# EAGLE board LM3S811 Module (EAGLE 6.3)
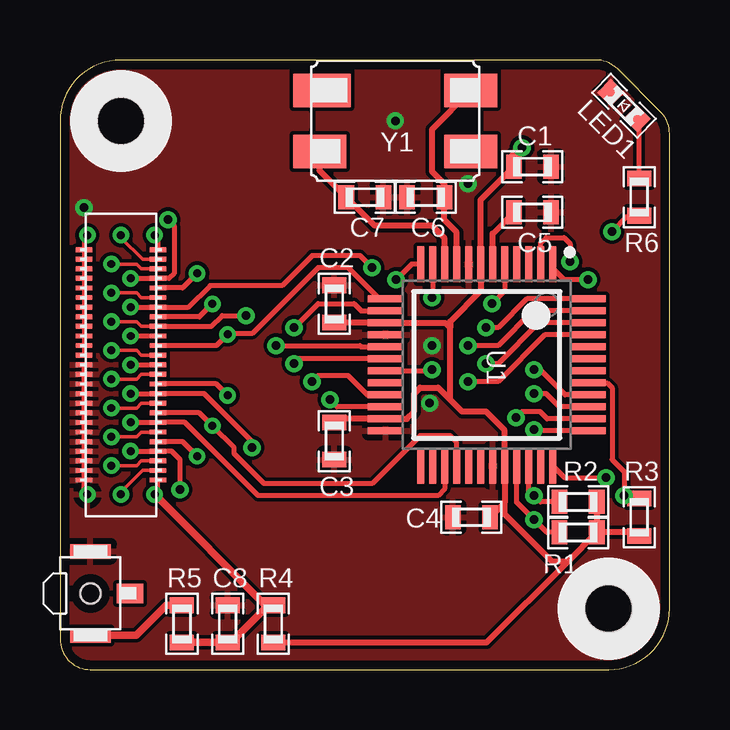
[diagram p0: board, top side]
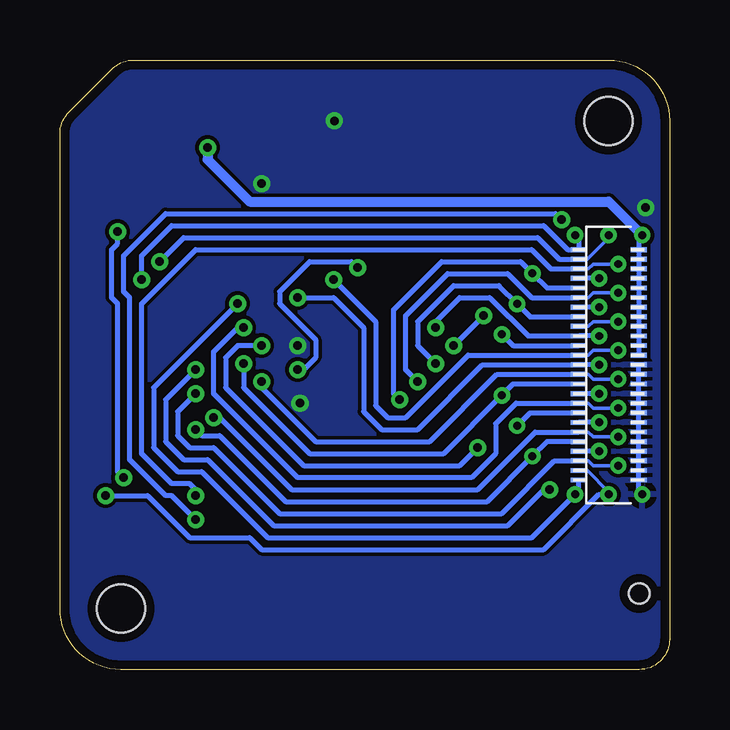
[diagram p1: board, bottom side, seen from below]

Size 25.4 x 25.4 mm. Coordinates in mm from the lower left corner, seen from the top.
Outline: 0,22.86 0,1.27 arc90 1.27,0 22.86,0 arc90 25.4,2.54 25.4,22.33 arc45 25.03,23.23 23.23,25.03 arc45 22.33,25.4 2.54,25.4 arc90 0,22.86
Copper layers (1*16): Top 0.0356mm / dielectric 1.5011mm / Bottom 0.0356mm
Design rules "default": minimum track width 6mil, minimum drill 13mil, track to track 6mil, track to pad 6mil, pad to pad 6mil, via to via 6mil, smd to smd 6mil, copper to edge 15mil, drill to drill 6mil, minimum pad ring 7mil, minimum via ring 7mil, stop-mask expansion 4mil, vias tented up to drill 16mil, thermal gap 10mil
tRestrict: 2 lines

## Footprints (pad centres in the part's own frame; a part is rotated, then mirrored left to right if it is on the bottom)
0603 = smd 0.65 x 1: 1 -0.775,0; 2 0.775,0
0603.LED = smd 0.8 x 0.8: P$1 -0.775,0; P$2 0.775,0
QFP50P900X900X160-48N = smd 1.5 x 0.3: 1 -4.2,2.75; 2 -4.2,2.25; 3 -4.2,1.75; 4 -4.2,1.25; 5 -4.2,0.75; 6 -4.2,0.25; 7 -4.2,-0.25; 8 -4.2,-0.75; 9 -4.2,-1.25; 10 -4.2,-1.75; 11 -4.2,-2.25; 12 -4.2,-2.75; 25 4.2,-2.75; 26 4.2,-2.25; 27 4.2,-1.75; 28 4.2,-1.25; 29 4.2,-0.75; 30 4.2,-0.25; 31 4.2,0.25; 32 4.2,0.75; 33 4.2,1.25; 34 4.2,1.75; 35 4.2,2.25; 36 4.2,2.75 | smd 0.3 x 1.5: 13 -2.75,-4.2; 14 -2.25,-4.2; 15 -1.75,-4.2; 16 -1.25,-4.2; 17 -0.75,-4.2; 18 -0.25,-4.2; 19 0.25,-4.2; 20 0.75,-4.2; 21 1.25,-4.2; 22 1.75,-4.2; 23 2.25,-4.2; 24 2.75,-4.2; 37 2.75,4.2; 38 2.25,4.2; 39 1.75,4.2; 40 1.25,4.2; 41 0.75,4.2; 42 0.25,4.2; 43 -0.25,4.2; 44 -0.75,4.2; 45 -1.25,4.2; 46 -1.75,4.2; 47 -2.25,4.2; 48 -2.75,4.2
2MM = hole 2: 0,0
ROOT1.BOTH = smd 0.66 x 0.2 bottom: 01 3.795,13.9; 02 3.795,13.5; 03 3.795,13.1; 3.3V@1 1.285,17.5; 3.3V@2 1.285,17.1; 3.3V@3 1.285,16.7; 3.3V@4 1.285,16.3; 3.3V@5 1.285,15.9; 3.3V@6 1.285,15.5; 3.3V@7 1.285,15.1; 3.3V@8 1.285,14.7; 3.3V@9 1.285,14.3; 3.3V@10 1.285,13.9; 3.3V@11 1.285,13.5; 3.3V@12 1.285,13.1; 04 3.795,12.7; 05 3.795,12.3; 06 3.795,11.9; 07 3.795,11.5; ADC0 3.795,17.5; ADC1 3.795,17.1; GND@1 1.285,7.9; GND@2 1.285,8.3; GND@3 1.285,8.7; GND@4 1.285,9.1; GND@5 1.285,9.5; GND@6 1.285,9.9; GND@7 1.285,10.3; GND@8 1.285,10.7; GND@9 1.285,11.1; GND@10 1.285,11.5; GND@11 1.285,11.9; GND@12 1.285,12.3; GND@13 1.285,12.7; MISO 3.795,15.5; MOSI 3.795,15.9; RST 3.795,7.9; RXI 3.795,14.3; RXI.DBG 3.795,10.3; SCL 3.795,16.3; SCLK 3.795,15.1; SDA 3.795,16.7; TCK 3.795,9.1; TDI 3.795,9.9; TDO 3.795,9.5; TMS 3.795,8.7; TRST 3.795,8.3; TXO 3.795,14.7; TXO.DBG 3.795,10.7; WAKE 3.795,11.1 | smd 0.7 x 0.2: 01@1 4.08,13.9; 02@1 4.08,13.5; 3.3V@13 1,17.5; 3.3V@14 1,17.1; 3.3V@15 1,16.7; 3.3V@16 1,16.3; 3.3V@17 1,15.9; 3.3V@18 1,15.5; 3.3V@19 1,15.1; 3.3V@20 1,14.7; 3.3V@21 1,14.3; 3.3V@22 1,13.9; 3.3V@23 1,13.5; 3.3V@24 1,13.1; 03@1 4.08,13.1; 04@1 4.08,12.7; 05@1 4.08,12.3; 06@1 4.08,11.9; 07@1 4.08,11.5; ADC0@1 4.08,17.5; ADC1@1 4.08,17.1; GND@14 1,7.9; GND@15 1,8.3; GND@16 1,8.7; GND@17 1,9.1; GND@18 1,9.5; GND@19 1,9.9; GND@20 1,10.3; GND@21 1,10.7; GND@22 1,11.1; GND@23 1,11.5; GND@24 1,11.9; GND@25 1,12.3; GND@26 1,12.7; MISO@1 4.08,15.5; MOSI@1 4.08,15.9; RST@1 4.08,7.9; RXI.DBG@1 4.08,10.3; RXI@1 4.08,14.3; SCL@1 4.08,16.3; SCLK@1 4.08,15.1; SDA@1 4.08,16.7; TCK@1 4.08,9.1; TDI@1 4.08,9.9; TDO@1 4.08,9.5; TMS@1 4.08,8.7; TRST@1 4.08,8.3; TXO.DBG@1 4.08,10.7; TXO@1 4.08,14.7; WAKE@1 4.08,11.1 | drill 0.33 pad 0.686: 01@VIA 2.94,13.9; 02@VIA 6.985,13.97; 3.3V@VIA 1.14,18.1; 03@VIA 2.14,13.3; 04@VIA 2.94,12.7; 05@VIA 2.14,12.1; 06@VIA 6.985,11.43; 07@VIA 2.94,11.5; ADC0@VIA 3.94,18.1; ADC1@VIA 2.54,18.1; GND@VIA 1.14,7.3; MISO@VIA 2.14,15.7; MOSI@VIA 5.715,16.51; RST@VIA 3.94,7.3; RXI.DBG@VIA 2.94,10.3; RXI@VIA 2.14,14.5; SCL@VIA 2.94,16.3; SCLK@VIA 2.94,15.1; SDA@VIA 2.14,16.9; TCK@VIA 2.94,9.1; TDI@VIA 2.14,9.7; TDO@VIA 5.715,8.89; TMS@VIA 2.14,8.5; TRST@VIA 2.54,7.3; TXO.DBG@VIA 6.35,10.16; TXO@VIA 6.35,15.24; WAKE@VIA 2.14,10.9
B3U-3100P(M)-B = smd 0.6 x 1.7: 1 -1.75,0; 2 1.75,0 | smd 0.8 x 1.1: GND 0,-1.65 | hole 0.85: 0,0
7X5MM = smd 2.2 x 1.4: 1 -3.15,-1.27; 2 -3.15,1.27; 3 3.15,1.27 | smd 2.4 x 1.4: 4 3.05,-1.27

## Placement (x,y rotation side)
C1  .1uF  [0603]  19.68,20.95 0 top
C2  .1uF  [0603]  11.43,15.24 90 top
C3  .1uF  [0603]  11.43,9.53 270 top
C4  .1uF  [0603]  17.14,6.35 180 top
C5  1uF  [0603]  19.68,19.05 0 top
C6  18pF  [0603]  15.24,19.68 180 top
C7  18pF  [0603]  12.7,19.68 0 top
C8  .01uF  [0603]  6.99,1.91 90 top
LED1  [0603.LED]  23.5,23.5 135 top
R1  2.2k  [0603]  21.59,5.71 180 top
R2  2.2k  [0603]  21.59,6.99 180 top
R3  10k  [0603]  24.13,6.35 90 top
R4  10k  [0603]  8.89,1.91 90 top
R5  470  [0603]  5.08,1.91 90 top
R6  470  [0603]  24.13,19.68 270 top
U1  LM3S811  [QFP50P900X900X160-48N]  17.78,12.7 270 top
U$3  HOLE.2MM  [2MM]  22.86,2.54 90 top
U$4  HOLE.2MM  [2MM]  2.54,22.86 90 top
U$8  ROOT1.BOTH  [ROOT1.BOTH]  0,0 0 top
U$10  B3U-3100P(M)-B  [B3U-3100P(M)-B]  1.27,3.17 90 top
Y1  CRYSTAL.7X5MM  [7X5MM]  13.97,22.86 180 top

## Library data of the parts
C1-C8 LED1 R1-R6 = .standardparts
U1 = RASEagleLib
U$3 U$4 = .screw_holes
U$8 = thinkmaketest
U$10 = omron
Y1 = abracon

## Nets
01: U1.14 U$8.01 U$8.01@1 U$8.01@VIA
02: U1.13 U$8.02 U$8.02@1 U$8.02@VIA
03: U1.12 U$8.03 U$8.03@1 U$8.03@VIA
3.3V: C1.1 C2.1 C3.1 C4.1 R1.1 R2.1 R3.1 R4.1 U1.7 U1.15 U1.23 U1.32 U$8.3.3V@1 U$8.3.3V@2 U$8.3.3V@3 U$8.3.3V@4 U$8.3.3V@5 U$8.3.3V@6 U$8.3.3V@7 U$8.3.3V@8 U$8.3.3V@9 U$8.3.3V@10 U$8.3.3V@11 U$8.3.3V@12 U$8.3.3V@13 U$8.3.3V@14 U$8.3.3V@15 U$8.3.3V@16 U$8.3.3V@17 U$8.3.3V@18 U$8.3.3V@19 U$8.3.3V@20 U$8.3.3V@21 U$8.3.3V@22 U$8.3.3V@23 U$8.3.3V@24 U$8.3.3V@VIA
04: U1.11 U$8.04 U$8.04@1 U$8.04@VIA
05: U1.45 U$8.05 U$8.05@1 U$8.05@VIA
06: U1.46 U$8.06 U$8.06@1 U$8.06@VIA
07: U1.47 U$8.07 U$8.07@1 U$8.07@VIA
!RST: C8.1 R4.2 R5.1 U1.5 U$8.RST U$8.RST@1 U$8.RST@VIA
ADC0: U1.1 U$8.ADC0 U$8.ADC0@1 U$8.ADC0@VIA
ADC1: U1.2 U$8.ADC1 U$8.ADC1@1 U$8.ADC1@VIA
GND: C1.2 C2.2 C3.2 C4.2 C5.2 C6.2 C7.2 C8.2 LED1.P$2 U1.8 U1.16 U1.24 U1.31 U$8.GND@1 U$8.GND@2 U$8.GND@3 U$8.GND@4 U$8.GND@5 U$8.GND@6 U$8.GND@7 U$8.GND@8 U$8.GND@9 U$8.GND@10 U$8.GND@11 U$8.GND@12 U$8.GND@13 U$8.GND@14 U$8.GND@15 U$8.GND@16 U$8.GND@17 U$8.GND@18 U$8.GND@19 U$8.GND@20 U$8.GND@21 U$8.GND@22 U$8.GND@23 U$8.GND@24 U$8.GND@25 U$8.GND@26 U$8.GND@VIA U$10.2
MISO: U1.21 U$8.MISO U$8.MISO@1 U$8.MISO@VIA
MOSI: U1.22 U$8.MOSI U$8.MOSI@1 U$8.MOSI@VIA
N$1: R5.2 U$10.1
N$2: LED1.P$1 R6.1
N$3: C5.1 U1.6
N$4: R6.2 U1.36
N$7: C7.1 U1.10 Y1.3
N$8: C6.1 U1.9 Y1.1
RXI: U1.17 U$8.RXI U$8.RXI@1 U$8.RXI@VIA
RXI.DBG: U1.27 U$8.RXI.DBG U$8.RXI.DBG@1 U$8.RXI.DBG@VIA
SCL: R1.2 U1.33 U$8.SCL U$8.SCL@1 U$8.SCL@VIA
SCLK: U1.19 U$8.SCLK U$8.SCLK@1 U$8.SCLK@VIA
SDA: R2.2 U1.34 U$8.SDA U$8.SDA@1 U$8.SDA@VIA
TCK: U1.40 U$8.TCK U$8.TCK@1 U$8.TCK@VIA
TDI: U1.38 U$8.TDI U$8.TDI@1 U$8.TDI@VIA
TDO: U1.37 U$8.TDO U$8.TDO@1 U$8.TDO@VIA
TMS: U1.39 U$8.TMS U$8.TMS@1 U$8.TMS@VIA
TRST: R3.2 U1.41 U$8.TRST U$8.TRST@1 U$8.TRST@VIA
TXO: U1.18 U$8.TXO U$8.TXO@1 U$8.TXO@VIA
TXO.DBG: U1.28 U$8.TXO.DBG U$8.TXO.DBG@1 U$8.TXO.DBG@VIA
WAKE: U1.48 U$8.WAKE U$8.WAKE@1 U$8.WAKE@VIA

## Tracks (layer width: path | path; a pad name or v marks a point on that pad's centre or on a via)
01  (via drill 0.36)
  Top 0.203: v9.75,14.25 10.75,15.25 12.25,15.25 12.55,14.95 U1.14
  Bottom 0.203: v9.75,14.25 9.75,14.5 8.75,15.5 7.5,15.5 5.9,13.9 U$8.01
02
  Top 0.203: U$8.02@VIA 7.01,14 8,14 10.75,16.75 12,16.75 13.3,15.45 U1.13
03  (via drill 0.36)
  Top 0.203: U1.12 14.65,16.9 v14,16.25
  Bottom 0.203: v14,16.25 12.25,14.5 12.25,11 11.75,10.5 11,10.5 8.4,13.1 U$8.03
3.3V  (via drill 0.36)
  Top 0.254: C3.1 11.58,10.45 U1.23 14.45,10.45 14.75,10.75 14.75,11.5 15,11.75 15.75,11.75 16.25,11.25 | C2.1 11.45,14.45 U1.15 16.05,14.45 16.25,14.25 | C1.1 17.53,19.57 U1.7 17.53,15.78 16.25,14.5 16.25,14.25 | R2.1 R1.1 | 21.15,4.5 R1.1 | R3.1 23.99,5.71 R1.1 | 16.25,11.25 16.75,10.75 17.75,10.75 18.53,9.97 U1.32 18.53,6.96 | 16.25,11.25 16.25,14.25 | 18.53,6.96 C4.1 | 21.15,4.5 20.5,4.5 18.53,6.47 18.53,6.96 | R4.1 17.78,1.13 21.15,4.5
  Top 0.406: C1.1 18.91,21.41 v19.25,21.75
  Bottom 0.406: v19.25,21.75 19.25,21.25 17.5,19.5 2.54,19.5 U$8.3.3V@VIA
04  (via drill 0.36)
  Top 0.203: U1.11 15.53,15.53 v15.5,15.5
  Bottom 0.203: v15.5,15.5 14,15.5 12.75,14.25 12.75,10.75 12,10 10.5,10 7.8,12.7 U$8.04
05  (via drill 0.36)
  Top 0.203: U1.45 20.2,13.95 18.25,12 v17,12
  Bottom 0.203: v17,12 17,11.75 14.75,9.5 10,9.5 7.2,12.3 U$8.05
06  (via drill 0.36)
  Top 0.203: U1.46 19.95,14.45 18.25,12.75 v17.75,12.75
  Bottom 0.203: v17.75,12.75 17.75,11.75 15,9 9.41,9 U$8.06@VIA
07  (via drill 0.36)
  Top 0.203: U1.47 19.7,14.95 18.25,13.5 v17,13.5 | v8,9.25 8,9.5 6,11.5 U$8.07@1
  Bottom 0.203: v17,13.5 18,13.5 18.5,13 18.5,11.75 15.25,8.5 8.75,8.5 v8,9.25
!RST  (via drill 0.36)
  Top 0.203: U1.5 18.53,15.78 v18,15.25
  Top 0.305: R5.1 C8.1 7.13,1.13 8.68,2.68 | 8.68,2.68 R4.2 | 8.68,2.68 8.56,2.68 U$8.RST@VIA
  Bottom 0.203: v18,15.25 21.5,11.75 21.5,9.25 20.5,8.25 19.5,8.25 16.75,5.5 5.74,5.5 U$8.RST@VIA
ADC0  (via drill 0.36)
  Top 0.203: v22,16.25 21,16.25 20.53,16.72 U1.1
  Bottom 0.203: U$8.ADC0 4.25,17.5 5.25,18.5 20.75,18.5 22,17.25 v22,16.25
ADC1  (via drill 0.36)
  Top 0.203: U1.2 20.03,17.78 20.25,18 21,18 21.25,17.75 v21.25,17
  Bottom 0.203: U$8.ADC1 4.6,17.1 5.5,18 20.25,18 v21.25,17
GND  (via drill 0.36)
  other vias: 13.97,22.86 17,20.25 15.5,13.5 15.4,11.1 1,19.25
  pour Bottom: 0,0 25.4,0 25.4,25.4 0,25.4
  pour Top: 0,0 25.4,0 25.4,25.4 0,25.4
MISO  (via drill 0.36)
  Top 0.203: U1.21 12.8,11.45 12,12.25 10.75,12.25 v10.5,12
  Bottom 0.203: v10.5,12 11,12.5 11,14.75 9.25,16.5 6.75,16.5 5.75,15.5 U$8.MISO
MOSI  (via drill 0.36)
  Top 0.203: U1.22 11.55,10.95 v11.25,11.25
  Bottom 0.203: v11.25,11.25 11.5,11.5 11.5,15 9.5,17 6.21,17 U$8.MOSI@VIA
N$1
  Top 0.305: U$10.1 3.17,1.43 4.43,2.68 R5.2
N$2
  Top 0.203: R6.1 24.13,22.86 LED1.P$1
N$3
  Top 0.254: U1.6 18.03,18.17 C5.1
N$4  (via drill 0.36)
  Top 0.203: U1.36 21.03,8 v22.75,8 | v23,18.25 23.66,18.91 R6.2
  Bottom 0.203: v22.75,8 23,8.25 23,15.25 23.25,15.5 23.25,17.5 23,17.75 v23,18.25
N$7
  Top 0.254: U1.10 16.03,17.97 15.5,18.5 13.11,18.5 C7.1 10.82,20.79 Y1.3
N$8
  Top 0.254: U1.9 16.53,18.22 16.02,18.73 C6.1 16.02,20.23 15.5,20.75 15.5,22.51 Y1.1
RXI  (via drill 0.36)
  Top 0.203: v9,13.5 12.5,13.5 12.55,13.45 U1.17 | U$8.RXI@1 6.3,14.3 6.75,14.75 v7.75,14.75
  Bottom 0.203: v7.75,14.75 v9,13.5
RXI.DBG
  Top 0.203: U1.27 16.03,7.53 15.75,7.25 8.25,7.25 5.2,10.3 U$8.RXI.DBG@1
SCL  (via drill 0.36)
  Top 0.203: U1.33 19.03,6.97 v19.75,6.25 20.29,5.71 R1.2 | v4.5,18.75 4.75,18.5 4.75,16.5 4.55,16.3 U$8.SCL@1
  Bottom 0.203: v19.75,6.25 20.75,7.25 21,7.25 22.5,8.75 22.5,15.5 22.75,15.75 22.75,17.25 21,19 4.75,19 v4.5,18.75
SCLK  (via drill 0.36)
  Top 0.203: U$8.SCLK@1 5.35,15.1 6.25,16 9.25,16 10.5,17.25 12.5,17.25 v13,16.75 | U1.19 15.45,12.45 v15.5,12.5
  Bottom 0.203: v13,16.75 13.25,17 15,17 16.25,15.75 16.25,15.25 14.75,13.75 14.75,13 15.25,12.5 v15.5,12.5
SDA  (via drill 0.36)
  Top 0.203: U1.34 19.53,7.47 v19.75,7.25 20.02,6.99 R2.2 21.02,6.99
  Bottom 0.203: v19.75,7.25 19.75,7.5 20,7.75 20.75,7.75 22,9 22,15.25 19.75,17.5 5.75,17.5 4.95,16.7 U$8.SDA
TCK  (via drill 0.36)
  Top 0.203: U1.40 21.05,11.45 20,12.5 v19.75,12.5 | v5,7.5 5,8.75 4.65,9.1 U$8.TCK@1
  Bottom 0.203: v19.75,12.5 21,11.25 21,9.5 20.25,8.75 19.25,8.75 16.5,6 6.75,6 5.25,7.5 v5,7.5
TDI  (via drill 0.36)
  Top 0.203: U1.38 20.3,10.45 20,10.75 19.25,10.75 v19,10.5
  Bottom 0.203: v19,10.5 18.75,10.5 15.75,7.5 8,7.5 5.6,9.9 U$8.TDI
TDO  (via drill 0.36)
  Top 0.203: U1.37 19.8,9.95 v19.75,10
  Bottom 0.203: v19.75,10 19.5,9.75 18.75,9.75 16,7 7.61,7 U$8.TDO@VIA
TMS  (via drill 0.36)
  Top 0.203: U1.39 20.8,10.95 20.25,11.5 v19.75,11.5
  Bottom 0.203: v19.75,11.5 20.5,10.75 20.5,9.75 20,9.25 19,9.25 16.25,6.5 7,6.5 4.8,8.7 U$8.TMS
TRST  (via drill 0.36)
  Top 0.203: U1.41 22.8,11.95 23,11.75 23,8.75 23.5,8.25 v23.5,7.25 23.62,7.12 R3.2
  Bottom 0.203: U$8.TRST@VIA 2.95,7.3 5.25,5 17,5 17.5,5.5 20,5.5 21.75,7.25 v23.5,7.25
TXO  (via drill 0.36)
  Top 0.203: U1.18 9.95,12.95 v9.75,12.75
  Bottom 0.203: v9.75,12.75 10.5,13.5 10.5,14.5 9,16 7.11,16 U$8.TXO@VIA
TXO.DBG
  Top 0.203: U1.28 16.53,9.47 16.25,9.75 15,9.75 13,7.75 8.5,7.75 7.25,9 7.25,9.25 U$8.TXO.DBG@VIA
WAKE  (via drill 0.36)
  Top 0.203: U1.48 19.45,15.45 18.25,14.25 v17.75,14.25
  Bottom 0.203: v17.75,14.25 18,14.25 19,13.25 19,11.5 15.5,8 8.25,8 7.25,9 7.25,10.25 6.4,11.1 U$8.WAKE

## Text on the board
tNames: Y1
bDocu: Cruz Monrreal II | v1 | InnovativeMaker.com